# Altium PCB jz_drive0227.PcbDoc
Units mm, origin at the board's own origin, x right, y up, seen from the top; angles counter-clockwise.
Board outline 105.92 x 101.27 mm, 2 copper layers (Top Layer, Bottom Layer); 68 components, 39 nets, 289 pads, 25 vias.
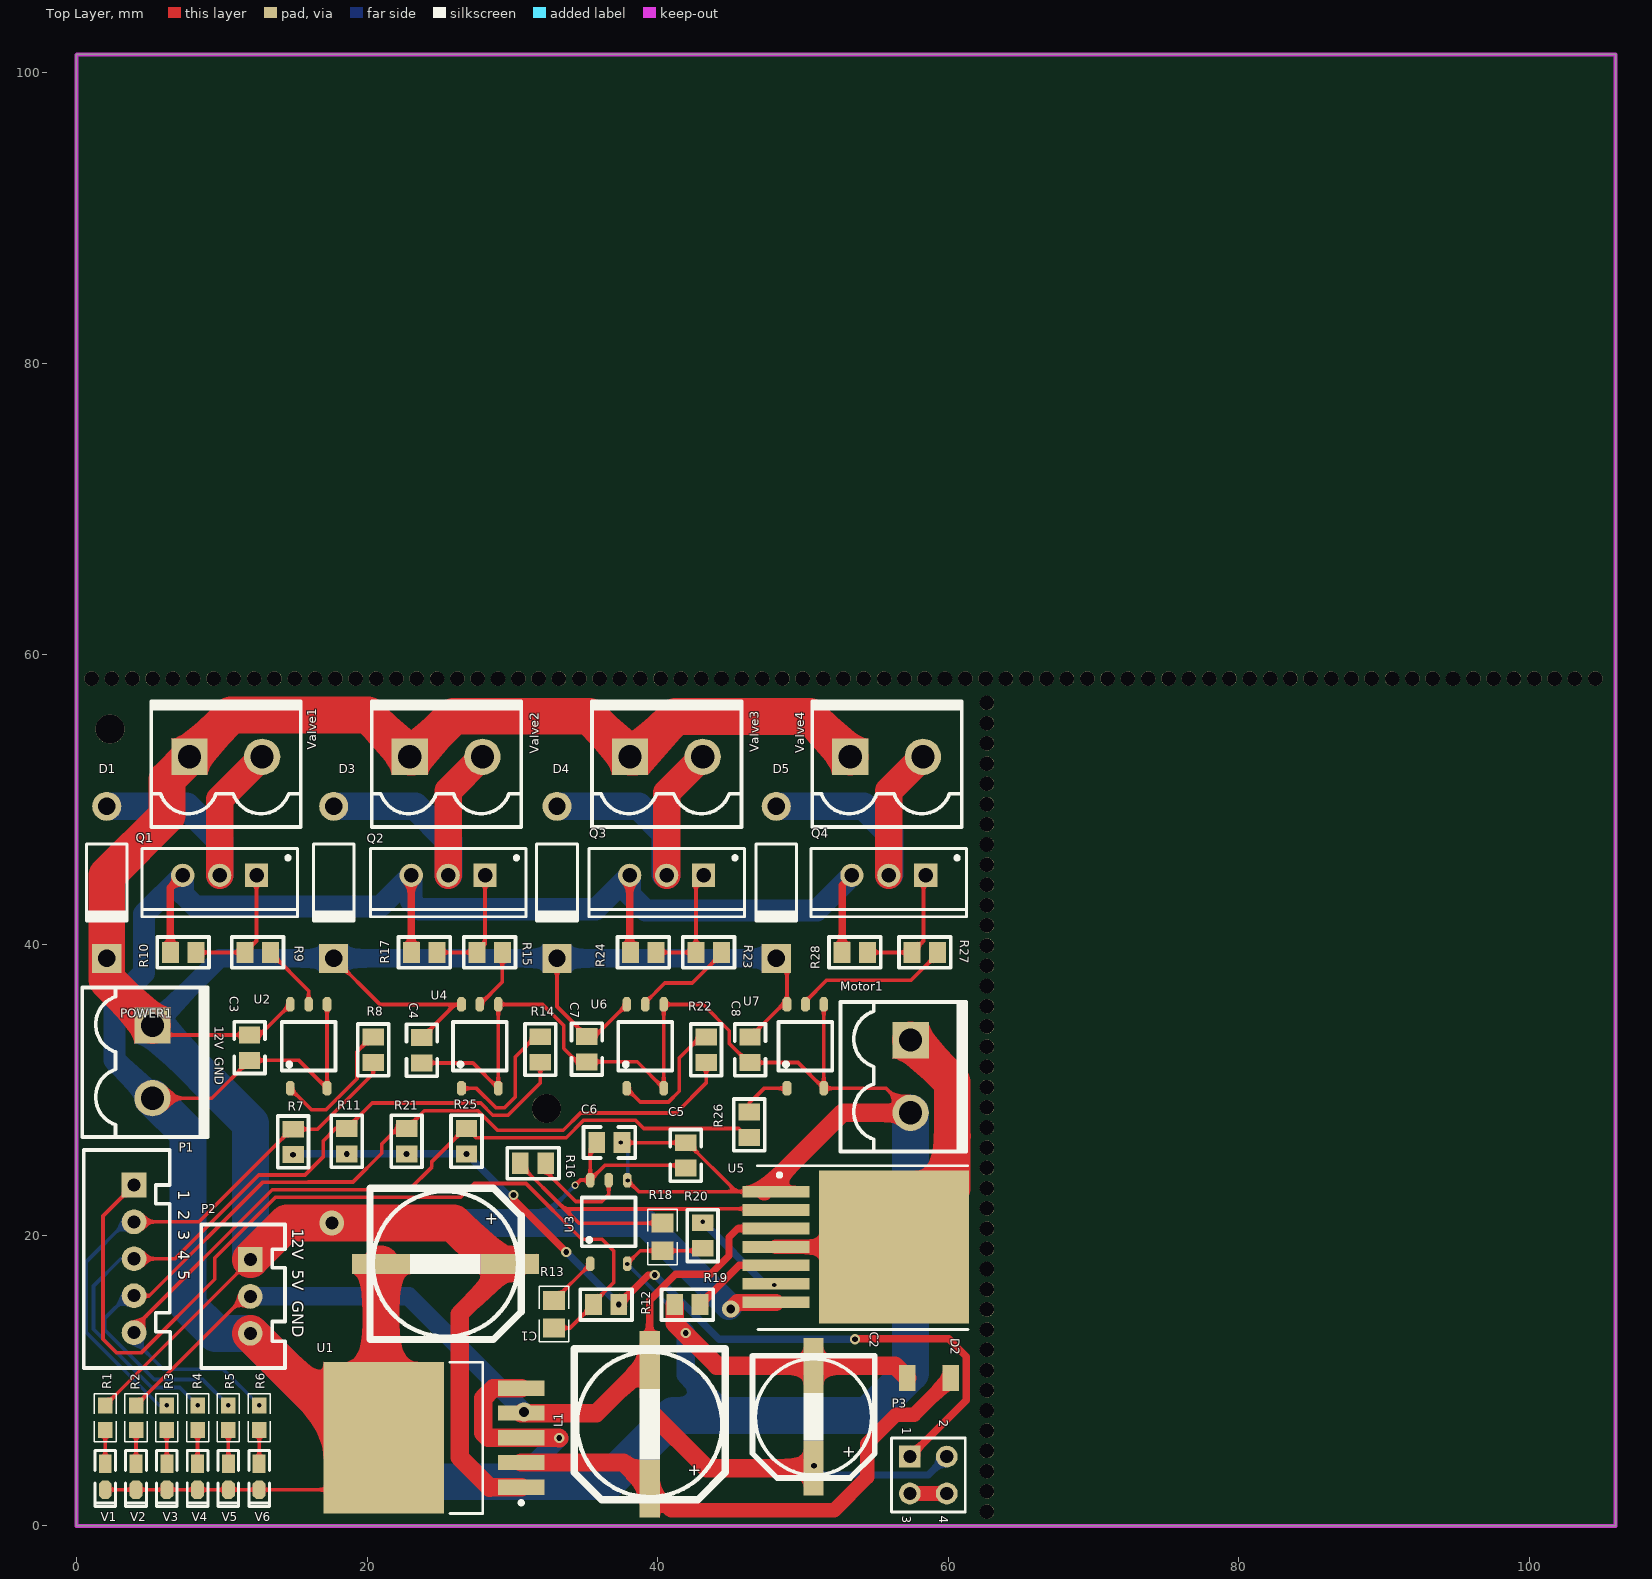
[diagram p0: Top Layer view]
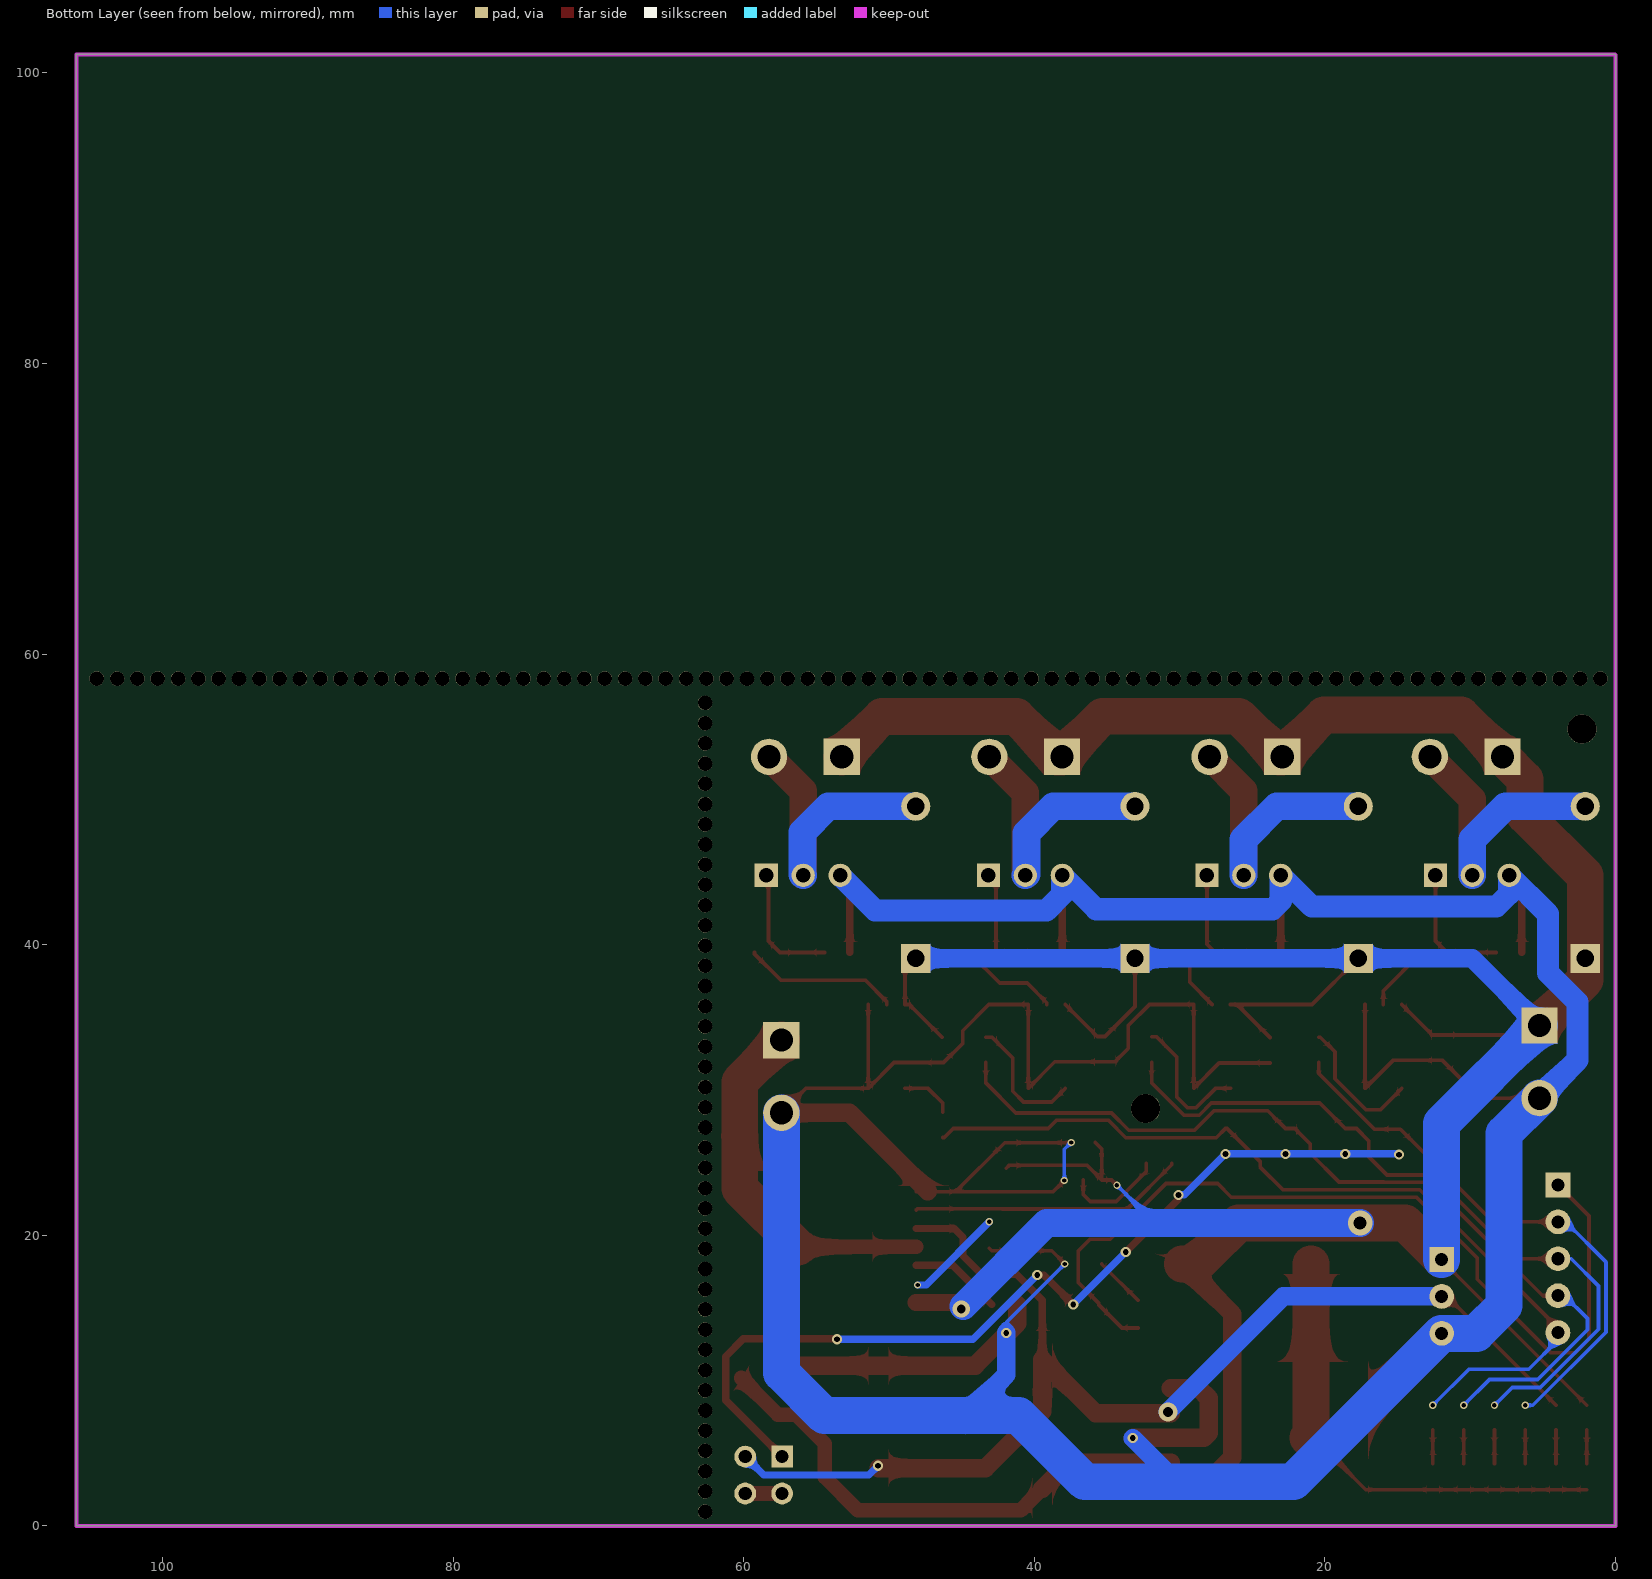
[diagram p1: Bottom Layer view, seen from below]

## Layer stack, top to bottom
Top Solder: solder mask 0.0102, Solder Resist, Dk 3.5
Top Layer: signal copper 0.0356
Dielectric 1: dielectric 0.32, FR-4, Dk 4.8
Bottom Layer: signal copper 0.0356
Bottom Solder: solder mask 0.0102, Solder Resist, Dk 3.5

## Board outline
0,0 0,101.244 0.025,101.27 105.918,101.27 105.918,0

## Design rules (kind name [scope] priority, off if disabled: settings)
Clearance [All] p1: gap=0.254 ignorepadtopadclearanceinfootprint=FALSE except(0: Arc-Hole Track-Hole SMDPad-Hole THPad-Hole Via-Hole Fill-Hole Poly-Hole Region-Hole Text-Hole)
ComponentClearance [All] p1: gap=0.22 collisioncheckmode=3 verticalgap=0.22 showdistances=FALSE
MinimumSolderMaskSliver [All] p1: minsoldermaskwidth=0.178
PolygonConnect [All] p1: connectstyle=Relief reliefconductorwidth=0.254 reliefentries=4 polygonreliefangle="90 Angle" airgapwidth=0.254
RoutingVias [All] p1: holewidth=0.3 width=0.5 viastyle="Through Hole" minholewidth=0.3 minwidth=0.5 maxholewidth=0.711 maxwidth=1.27
SilkToSilkClearance [All] p1: silktosilkclearance=0
SilkToSolderMaskClearance [IsPad] p1: minsilkscreentomaskgap=0 clearancetoexposedcopper=TRUE
SolderMaskExpansion [All] p1: expansion=0.102
Width [All] p1: maxlimit=2.54 minlimit=0.254 preferedwidth=0.254 minimp=50.000000 maximp=50.000000 favimp=50.000000
Width GND [InNet('GND')] p2: maxlimit=2.54 minlimit=0.254 preferedwidth=1.27 minimp=50.000000 maximp=50.000000 favimp=50.000000
Width 3.3V [InNet('VDD3.3')] p3: maxlimit=2.54 minlimit=0.254 preferedwidth=1.27 minimp=50.000000 maximp=50.000000 favimp=50.000000
Width 5V [InNet('VDD5.0')] p4: maxlimit=2.54 minlimit=0.254 preferedwidth=1.27 minimp=50.000000 maximp=50.000000 favimp=50.000000
Width POWER [InNet('POWERA')] p5: maxlimit=2.54 minlimit=0.254 preferedwidth=2.54 minimp=50.000000 maximp=50.000000 favimp=50.000000
26 further rules are at their usual default settings.

## Components (designator, comment, footprint, x,y, rotation, side; value= is the part's Value field where it differs from the comment)
C1 "10uF,16V" SMD-EC-F10 29.82,18.034 r180 top value=680uF
C2 "10uF,16V" SMD-EC-F8 50.724,3.988 r90 top value=220uF
C3 "0.1uF" LC-0805_C 11.913,32.918 r270 top
C4 "0.1uF" LC-0805_C 23.774,32.741 r270 top
C5 "0.1uF" LC-0805_C 41.935,25.502 r90 top
C6 "0.1uF" LC-0805_C 36.678,26.391 r0 top
C7 "0.1uF" LC-0805_C 35.128,32.817 r270 top
C8 "0.1uF" LC-0805_C 46.355,32.766 r270 top
D1 "1N4001" DO-41 2.083,44.298 r270 top
D2 "IN5824" LC-1206 58.674,10.185 r0 top
D3 "Diode 1N4001" DO-41 17.704,44.298 r270 top
D4 "Diode 1N4001" DO-41 33.071,44.298 r270 top
D5 "Diode 1N4001" DO-41 48.158,44.298 r270 top
L1 "Inductor" SMD-EC-F10 39.446,2.57 r90 top value=33uH
Motor1 "端子2P" KF2EDGK5.0-LI-2P 57.404,30.937 r270 top
P1 "Header 5" XH2.54-LI-5P 3.962,18.39 r270 top
P2 "Header 3" XH2.54-LI-3P 11.963,15.797 r270 top
P3 "Header 2X2" HDR2X2 57.353,4.775 r270 top
POWER1 "端子2P" KF2EDGK5.0-LI-2P 5.232,31.942 r270 top
Q1 "IRF540N" TO-220AB 9.855,44.78 r180 top
Q2 "IRF540N" TO-220AB 25.578,44.78 r180 top
Q3 "IRF540N" TO-220AB 40.615,44.78 r180 top
Q4 "IRF540N" TO-220AB 55.905,44.78 r180 top
R1 "1K" 0603-1 1.98,7.454 r270 top
R2 "1K" 0603-1 4.098,7.454 r270 top
R3 "1K" 0603-1 6.217,7.454 r270 top
R4 "1K" 0603-1 8.336,7.454 r270 top
R5 "1K" 0603-1 10.454,7.454 r270 top
R6 "1K" 0603-1 12.573,7.454 r270 top
R7 "10k" LC-0805_R 14.91,26.43 r270 top
R8 "150" LC-0805_R 20.422,32.766 r90 top
R9 "50" LC-0805_R 12.471,39.472 r180 top
R10 "10K" LC-0805_R 7.341,39.472 r0 top
R11 "10k" LC-0805_R 18.599,26.481 r270 top
R12 "10k" LC-0805_R 36.449,15.24 r0 top
R13 "150" 0805-1 32.868,14.58 r90 top
R14 "150" LC-0805_R 31.928,32.791 r90 top
R15 "50" LC-0805_R 28.434,39.472 r180 top
R16 "50" LC-0805_R 31.42,24.968 r180 top
R17 "10K" LC-0805_R 23.941,39.472 r0 top
R18 "10k" 0805-1 40.335,19.895 r90 top
R19 "3.3K" LC-0805_R 42.048,15.24 r0 top
R20 "3.3K" LC-0805_R 43.094,19.99 r90 top
R21 "10k" LC-0805_R 22.72,26.481 r270 top
R22 "150" LC-0805_R 43.332,32.766 r90 top
R23 "50" LC-0805_R 43.51,39.472 r180 top
R24 "10K" LC-0805_R 39.014,39.472 r0 top
R25 "10k" LC-0805_R 26.841,26.481 r270 top
R26 "150" LC-0805_R 46.304,27.61 r90 top
R27 "50" LC-0805_R 58.383,39.472 r180 top
R28 "10K" LC-0805_R 53.569,39.472 r0 top
U1 "LM2596S-5.0" TS5B_N 24.608,6.071 r180 top
U2 "TLP155" so6 14.707,30.115 r0 top
U3 "TLP155" so6 35.357,18.034 r0 top
U4 "TLP155" so6 26.492,30.115 r0 top
U5 "BTS7960" BTS7960 56.388,19.202 r270 top
U6 "TLP155" so6 37.871,30.115 r0 top
U7 "TLP155" so6 48.895,30.115 r0 top
V1 "LED Chip" "LED 0603G" 1.974,3.39 r270 top
V2 "LED Chip" "LED 0603G" 4.092,3.39 r270 top
V3 "LED Chip" "LED 0603R" 6.211,3.39 r270 top
V4 "LED Chip" "LED 0603R" 8.329,3.39 r270 top
V5 "LED Chip" "LED 0603R" 10.447,3.39 r270 top
V6 "LED Chip" "LED 0603R" 12.566,3.39 r270 top
Valve1 "" KF2EDGK5.0-LI-2P 10.276,52.934 r0 top
Valve2 "端子2P" KF2EDGK5.0-LI-2P 25.435,52.934 r0 top
Valve3 "端子2P" KF2EDGK5.0-LI-2P 40.594,52.934 r0 top
Valve4 "端子2P" KF2EDGK5.0-LI-2P 55.753,52.934 r0 top

## Footprints (in the part's own frame and the unit in brackets; to place one, negate y for a bottom-side part, rotate by r counter-clockwise, add the part's x,y. Pads: shape width x height; smd on the part's side, far side on the other; paste and mask are expansions set on the pad)
0603-1 [mm] "贴片带丝印"
  rect 1.1x1 smd: 1(-0.85,0) 2(0.85,0)
  silkscreen extent -1.65,-0.76 1.65,0.76, body extent -1.14,-0.38 1.14,0.38, height 1
0805-1 [mm] "贴片带丝印"
  rect 1.3x1.5 smd: 1(-0.95,0) 2(0.95,0)
  silkscreen extent -1.91,-1.02 1.91,1.02, body extent -1.14,-0.51 1.14,0.51, height 1
BTS7960 [mm] "贴片BTS7960"
  rect 0.8x4.6 smd: 1(-3.81,-8.255) 2(-2.54,-8.255) 3(-1.27,-8.255) 4(0,-8.255) 5(1.27,-8.255) 6(2.54,-8.255) 7(3.81,-8.255)
  rect 10.5x10.3 smd: 8(0,-0.127)
  silkscreen extent -5.59,-9.53 5.68,4.96
DO-41 [mm] "Diode, Axial; Body 5.2 x 2.7 mm (LxDia. max), Lead Dia. 0.86 mm (max)"
  round 2 hole 1.2: 1(-5.23,0)
  rect 2x2 hole 1.2: 2(5.23,0)
  silkscreen extent -2.65,-1.4 2.75,1.4
HDR2X2 [mm] "Connector; Header; 2x2 Position"
  rect 1.5x1.5 hole 0.9: 1(0,0)
  round 1.5 hole 0.9: 2(0,2.54) 3(2.54,0) 4(2.54,2.54)
  silkscreen extent -1.27,-1.27 3.81,3.81
KF2EDGK5.0-LI-2P [mm] "立插端子"
  rect 2.5x2.5 hole 1.6: 1(-2.5,0)
  round 2.5 hole 1.6: 2(2.5,0)
  silkscreen extent -5.12,-4.83 5.17,3.81, body extent -5.04,-4.75 5.04,3.75, height 11.25
LC-0805_C [mm]
  rect 1.16x1.47 smd: 1(-0.875,0) 2(0.875,0)
  silkscreen extent -1.78,-1.06 1.78,1.06, body extent -1,-0.62 1,0.63, height 0.77
LC-0805_R [mm]
  rect 1.16x1.47 smd: 1(-0.875,0) 2(0.875,0)
  silkscreen extent -1.78,-1.06 1.78,1.06, body extent -1,-0.62 1,0.63, height 0.49
LC-1206 [mm]
  rect 1.13x1.8 smd: 1(-1.49,0) 2(1.49,0)
"LED 0603G" [mil] "绿色0603LED"
  rect 50x35 smd: 1(-35,0.26)
  oct 50x35 smd: 2(35,0.26)
  silkscreen extent -71,-28 81,28, body extent -31,-16 32,16, height 18
"LED 0603R" [mil] "红色0603LED"
  rect 50x35 smd: 1(-35,0.26)
  oct 50x35 smd: 2(35,0.26)
  silkscreen extent -71,-28 81,28, body extent -31,-16 31,16, height 18
SMD-EC-F8 [mm]
  rect 3.8x1.4 smd: 1(0,0) 2(7.051,0)
  silkscreen extent -0.69,-4.22 7.71,4.2
SMD-EC-F10 [mm]
  rect 4x1.4 smd: 1(0,0) 2(8.86,0)
  silkscreen extent -0.78,-5.2 9.62,5.2
so6 [mm]
  oct 0.6x1 smd: 1(0,0) 3(2.54,0) 4(2.54,5.775) 5(1.27,5.775) 6(0,5.775)
  silkscreen extent -0.58,1.22 3.12,4.57
TO-220AB [mm] "TO, Thru-Hole, Vertical, Heatsink Mounted; 3 In-Line Leads; Pitch 2.54 mm"
  rect 1.6x1.6 hole 1: 1(-2.54,0)
  round 1.6 hole 1: 2(0,0) 3(2.54,0)
  silkscreen extent -5.35,-1.85 5.35,2.85, body extent -5.4,-1.9 5.4,2.9, height 19.3
TS5B_N [mm] "D2-PAK, 6-Leads, Body 8.6x10.2mm, Pitch 1.7mm, Lead Span 14.1mm, IPC Medium Density"
  rect 3.2x1.05 smd: 1(-6,3.4) 2(-6,1.7) 3(-6,0) 4(-6,-1.7) 5(-6,-3.4)
  rect 8.3x10.45 smd: 6(3.45,0)
  silkscreen extent -6.13,-5.2 -1.1,5.2, body extent -3.35,-5.2 6.05,5.2, height 4.65
XH2.54-LI-3P [mm] "接插件，3P"
  rect 1.7x1.7 hole 0.9: 1(-2.54,0)
  round 1.7 hole 0.9: 2(0,0) 3(2.54,0)
  silkscreen extent -4.95,-3.38 4.93,2.39, body extent -5.04,-3.3 5.04,2.4, height 7.03
XH2.54-LI-5P [mm] "接插件，5P"
  rect 1.7x1.7 hole 0.9: 1(-5.08,0)
  round 1.7 hole 0.9: 2(-2.54,0) 3(0,0) 4(2.54,0) 5(5.08,0)
  silkscreen extent -7.48,-3.45 7.52,2.49, body extent -7.58,-3.3 7.58,2.4, height 7.03

## Part data
C1 C2: library part "Cap Pol 2x5", "Polarized Capacitor (Radial)", Voltage=16V, Published=8-Jun-2000, Publisher="Altium Limited", Revision="July-2002: Re-released for DXP Platform."
C3 C4 C5 C6 C7 C8: library part Cap, "Capacitor", LatestRevisionDate=17-Jul-2002, LatestRevisionNote="Re-released for DXP Platform.", PackageDescription="Radial Cap, Thru-Hole; 2 Leads; 0.3 in Pin Spacing", PackageReference=RAD-0.3, Published=8-Jun-2000, Publisher="Altium Limited"
D1: library part "Diode 1N4001", "1 Amp General Purpose Rectifier", Code_JEDEC=DO-204-AL, ComponentLink1Description="Manufacturer Link", ComponentLink1URL=http://www.fairchildsemi.com/, ComponentLink2Description=Datasheet, ComponentLink2URL=http://www.fairchildsemi.com/ds/1N%2F1N4001.pdf, DatasheetVersion=1998, LatestRevisionDate=17-Jul-2002, LatestRevisionNote="Re-released for DXP Platform.", PackageDescription="Diode, Axial; Body 5.2 x 2.7 mm (LxDia. max), Lead Dia. 0.86 mm (max)", PackageReference=DO-41, PackageVersion=Aug-1999, Published=8-Jun-2000, Publisher="Altium Limited"
D2: library part "Diode  Zener", "Zener Diode", Published=8-Jun-2000, Publisher="Altium Limited", Revision="July-2002: Re-released for DXP Platform."
D3 D4 D5: "1 Amp General Purpose Rectifier", Code_JEDEC=DO-204-AL, ComponentLink1Description="Manufacturer Link", ComponentLink1URL=http://www.fairchildsemi.com/, ComponentLink2Description=Datasheet, ComponentLink2URL=http://www.fairchildsemi.com/ds/1N%2F1N4001.pdf, DatasheetVersion=1998, LatestRevisionDate=17-Jul-2002, LatestRevisionNote="Re-released for DXP Platform.", PackageDescription="Diode, Axial; Body 5.2 x 2.7 mm (LxDia. max), Lead Dia. 0.86 mm (max)", PackageReference=DO-41, PackageVersion=Aug-1999, Published=8-Jun-2000, Publisher="Altium Limited"
Motor1 POWER1 Valve1 Valve2 Valve3 Valve4: library part DUANZI2
P1: "Header, 5-Pin", LatestRevisionDate=17-Jul-2002, LatestRevisionNote="Re-released for DXP Platform.", Publisher="Altium Limited"
P2: "Header, 3-Pin", LatestRevisionDate=17-Jul-2002, LatestRevisionNote="Re-released for DXP Platform.", Publisher="Altium Limited"
P3: "Header, 2-Pin, Dual row", LatestRevisionDate=17-Jul-2002, LatestRevisionNote="Re-released for DXP Platform.", Publisher="Altium Limited"
Q1 Q2 Q3 Q4: "HEXFET Power MOSFET", ComponentLink1Description="Manufacturer Link", ComponentLink1URL=http://www.irf.com/, ComponentLink2Description=Datasheet, ComponentLink2URL=http://www.irf.com/product-info/datasheets/data/irf540n.pdf, DatasheetVersion=May-1998, LatestRevisionDate=17-Jul-2002, LatestRevisionNote="Re-released for DXP Platform.", Note="Pin 2 is electrically connected to pin 4.", PackageDescription="TO, Thru-Hole, Vertical, Heatsink Mounted; 3 In-Line Leads; Pitch 2.54 mm", PackageReference=TO-220AB, PackageVersion=Feb-1997, Published=8-Jun-2000, Publisher="Altium Limited", Sim Note="Thermal Model provided is not called on from main Subckt."
R1 R2 R3 R4 R5 R6: library part "Resistor Chip 0805", "Resistor", Published=8-Jun-2000, Publisher="Altium Limited", Revision="July-2002: Re-released for DXP Platform."
R7 R8 R9 R10 R11 R12 R13 R14 R15 R16 R17 R18 R19 R20 R21 R22 R23 R24 R25 R26 R27 R28: library part Res2, "Resistor", LatestRevisionDate=17-Jul-2002, LatestRevisionNote="Re-released for DXP Platform.", PackageDescription="Axial Device, Thru-Hole; 2 Leads; 0.4 in Pin Spacing", PackageReference=AXIAL-0.4, Published=8-Jun-2000, Publisher="Altium Limited"
U1: "SIMPLE SWITCHER?Power Converter 150 KHz 3A Step-Down Voltage Regulator, 5-pin TO-263", Manufacturer="National Semiconductor", PackageTopMarking="NSUZXYTTE#*LM2596S*-5.0 P+", PowerWise=N, Supplier Part Number 1=1214546, Code_JEDEC=MO-169-AB, ComponentLink1Description="LM2596 Datasheet", ComponentLink1URL=http://www.national.com/ds/LM/LM2596.pdf, ComponentLink2Description="LM2596 Web Page", ComponentLink2URL=http://www.national.com/pf/LM/LM2596.html, ComponentLink3Description="TS5B Package Page", ComponentLink3URL=http://www.national.com/packaging/folders/ts5b.html, CompType=Switcher, DatasheetVersion=May-2002, PackageDescription="TO-263, Molded, .400 x .390 x .180in, 5 Lead, .067in Pitch, Surface Mount", PackageReference=TS5B, PackageVersion="revD, Apr-2005", PartNumber=LM2596S-5.0, PinCount=5, Published=4-Dec-2008, Publisher="Altium Limited", RoHS=N, Supplier 1=Farnell
U5: library part Component_1_1
V1 V2 V3 V4 V5 V6: "Typical Chip LED", Published=8-Jun-2000, Publisher="Altium Limited", Revision="July-2002: Re-released for DXP Platform."
L1: Code_IEC=1005, Code_JEITA=0402, LatestRevisionDate=29-May-2009, LatestRevisionNote="IPC-7351 Footprint Added.", PackageDescription="Chip Inductor", PackageReference=0402-A, Published=8-Jun-2000, Publisher="Altium Limited"

## Free pads (board coordinates)
  round 2 hole 2 unplated: 4(2.311,54.839) 5(32.334,28.727)
  round 1 hole 1 unplated: 6(1.041,58.318) 6(6.635,58.318) 6(12.228,58.318) 6(17.822,58.318) 6(23.415,58.318) 6(29.009,58.318) 6(34.602,58.318) 6(40.196,58.318) 6(45.789,58.318) 6(51.383,58.318) 6(56.976,58.318) 6(62.57,58.318) 6(62.66,3.773) 6(62.66,9.338) 6(62.66,14.903) 6(62.66,20.468) 6(62.66,26.033) 6(62.66,31.597) 6(62.66,37.162) 6(62.66,45.509) 6(62.66,51.074) 6(62.66,53.857) 6(62.66,56.639) 6(68.163,58.318) 6(73.757,58.318) 6(79.35,58.318) 6(84.944,58.318) 6(93.334,58.318) 6(98.927,58.318) 6(101.724,58.318) 7(2.44,58.318) 7(8.033,58.318) 7(13.627,58.318) 7(19.22,58.318) 7(24.814,58.318) 7(30.407,58.318) 7(36.001,58.318) 7(41.594,58.318) 7(47.188,58.318) 7(52.781,58.318) 7(58.375,58.318) 7(62.66,5.165) 7(62.66,10.729) 7(62.66,16.294) 7(62.66,21.859) 7(62.66,27.424) 7(62.66,32.989) 7(62.66,38.553) 7(62.66,46.901) 7(62.66,52.466) 7(63.968,58.318) 7(69.561,58.318) 7(75.155,58.318) 7(80.748,58.318) 7(86.342,58.318) 7(94.732,58.318) 7(103.122,58.318) 8(3.838,58.318) 8(9.432,58.318) 8(15.025,58.318) 8(20.619,58.318) 8(26.212,58.318) 8(31.806,58.318) 8(37.399,58.318) 8(42.992,58.318) 8(48.586,58.318) 8(54.179,58.318) 8(59.773,58.318) 8(62.66,0.991) 8(62.66,6.556) 8(62.66,12.121) 8(62.66,17.685) 8(62.66,23.25) 8(62.66,28.815) 8(62.66,34.38) 8(62.66,39.945) 8(62.66,42.727) 8(62.66,48.292) 8(65.366,58.318) 8(70.96,58.318) 8(76.553,58.318) 8(82.147,58.318) 8(87.74,58.318) 8(90.537,58.318) 8(96.13,58.318) 8(104.521,58.318) 9(5.237,58.318) 9(10.83,58.318) 9(16.423,58.318) 9(22.017,58.318) 9(27.61,58.318) 9(33.204,58.318) 9(38.797,58.318) 9(44.391,58.318) 9(49.984,58.318) 9(55.578,58.318) 9(61.171,58.318) 9(62.66,2.382) 9(62.66,7.947) 9(62.66,13.512) 9(62.66,19.077) 9(62.66,24.641) 9(62.66,30.206) 9(62.66,35.771) 9(62.66,41.336) 9(62.66,44.118) 9(62.66,49.683) 9(62.66,55.248) 9(66.765,58.318) 9(72.358,58.318) 9(77.952,58.318) 9(83.545,58.318) 9(89.139,58.318) 9(91.935,58.318) 9(97.529,58.318) 9(100.326,58.318)

## Via types
v1: diameter 0.7, hole 0.4, Top Layer to Bottom Layer, 12 vias
v2: diameter 0.5, hole 0.3, Top Layer to Bottom Layer, 10 vias
v3: diameter 1.2, hole 0.6, Top Layer to Bottom Layer, 1 vias
v4: diameter 1.7, hole 0.9, Top Layer to Bottom Layer, 1 vias
v5: diameter 1.3, hole 0.7, Top Layer to Bottom Layer, 1 vias

## Nets (pads, with @x,y where several pads share a name; then routed paths per layer and width w, separated by ;. In a path a pad name is that pad's centre, name@x,y a point inside that pad or via, vN(x,y) a via of type N, cw(c..) or ccw(c..) an arc to the next point about the centre after c; other vN are vias at no path point)
EPWM1_A: P1.1 R12.1 R13.1 | length 62.3
  Top Layer w0.254: P1.1 1.829,21.336 1.829,12.852 2.769,11.913 4.445,11.913 9.508,16.976 9.508,18.449 13.691,22.631 26.441,22.631 27.381,23.571 30.937,23.571 34.773,19.736 36.17,19.736 36.982,18.923 36.982,16.752 35.574,15.344 R12.1 33.964,13.63 R13.1
EPWM2_A: P1.2 R3.1 R7.1 R8.1 | length 38.4
  Top Layer w0.254: P1.2 8.431,20.93 14.806,27.305 R7.1 16.583,27.305 20.422,31.144 R8.1
  Bottom Layer w0.254: P1.2 3.429,20.93 0.66,18.161 0.66,13.335 5.691,8.304 v2(6.217,8.304)
EPWM3_A: P1.3 R4.1 R11.1 R14.1 | length 51.6
  Top Layer w0.254: P1.3 6.782,18.39 12.548,24.155 15.723,24.155 16.993,25.425 16.993,26.518 17.831,27.356 R11.1 20.352,29.108 27.82,29.108 28.655,28.274 29.696,28.274 31.928,30.505 R14.1
  Bottom Layer w0.254: P1.3 3.048,18.39 1.168,16.51 1.168,13.545 5.189,9.525 7.115,9.525 v2(8.336,8.304)
EPWM4_A: P1.4 R5.1 R21.1 R22.1 | length 62.5
  Top Layer w0.254: P1.4 5.004,15.85 12.802,23.647 15.933,23.647 15.958,23.673 19.025,23.673 21.006,25.654 21.006,26.289 22.073,27.356 R21.1 23.939,28.575 27.635,28.575 28.981,27.229 33.495,27.229 34.689,28.423 41.275,28.423 43.332,30.48 R22.1
  Bottom Layer w0.254: P1.4 3.505,15.85 1.93,14.275 1.93,13.502 5.348,10.084 8.675,10.084 v2(10.454,8.304)
EPWM5_A: P1.5 R6.1 R25.1 R26.1 | length 60.8
  Top Layer w0.254: P1.5 3.962,13.622 13.48,23.139 22.885,23.139 24.46,24.714 24.46,25.078 26.738,27.356 R25.1 27.476,26.721 33.706,26.721 34.9,27.915 38.481,27.915 39.04,27.356 45.579,27.356 46.2,26.735 R26.1
  Bottom Layer w0.254: P1.5 3.962,12.802 5.969,10.795 10.082,10.795 v2(12.573,8.304)
GND: C1.2 C2.2 C3.2 C4.2 C5.2 C6.2 C7.2 C8.2 D2.1 Motor1.2 P2.3 POWER1.2 Q1.3 Q2.3 Q3.3 Q4.3 R10.1 R17.1 R18.1 R19.1 R20.1 R24.1 R28.1 U1.3 U1.5 U1.6 U2.3 U2.4 U3.3 U3.4 U4.3 U4.4 U5.1 U6.3 U6.4 U7.3 U7.4 V1.2 V2.2 V3.2 V4.2 V5.2 V6.2 | length 396.2
  Top Layer w0.254: V1.2 V2.2 V3.2 V4.2 V5.2 V6.2 17.192,2.501 20.762,6.071 U1.6@20.96,6.269 ; POWER1.2 9.311,29.442 C3.2 15.318,32.043 U2.3 U2.4 ; C4.2 27.282,31.866 U4.3 U4.4 32.08,35.89 33.528,34.442 33.528,32.868 34.454,31.942 C7.2 38.585,31.942 U6.3 U6.4 43.129,35.89 44.933,34.087 44.933,33.21 46.251,31.891 C8.2 49.659,31.891 U7.3 ; C6.2 37.567,26.377 C5.2 42.039,26.377 45.403,23.012 ; v2(37.897,18.034) 38.808,18.945 R18.1 42.924,18.945 R20.1 ; U3.4 v2(37.931,23.774) 38.693,23.012 45.403,23.012 ; U5.1 45.403,23.012 ; U7.4 U7.3 ; Motor1.2 55.726,30.115 U7.3
  Top Layer w0.508: R10.1 6.466,43.931 Q1.3 ; Q2.3 23.038,39.5 R17.1 ; Q3.3 38.075,39.536 R24.1 ; R28.1 52.694,44.108 Q4.3
  Top Layer w1.27: U1.5 28.673,9.471 27.991,8.788 27.991,6.401 28.321,6.071 U1.3 33.198,6.071 v1(33.223,6.045) ; R19.1 41.173,13.945 44.079,11.039 C2.2 56.331,11.039 D2.1 ; U5.1@47.32,23.031 52.726,28.437 Motor1.2
  Top Layer w2.54: P2.3 19.15,6.071 20.762,6.071 U1.6 20.96,6.269 C1.2
  Bottom Layer w0.254: v2(37.465,26.391) 37.931,25.924 v2(37.931,23.774) ; v2(37.897,18.034) 41.935,13.995 v1(41.935,13.284)
  Bottom Layer w1.27: 30.505,3.046 30.505,3.327 v1(33.223,6.045) ; v1(41.935,13.284) 41.935,10.414 44.755,7.595
  Bottom Layer w1.524: POWER1.2 2.616,32.058 2.616,36.043 4.648,38.075 4.648,42.113 Q1.3 7.315,43.51 8.204,42.621 20.879,42.621 Q2.3 23.038,43.002 23.597,42.443 35.738,42.443 Q3.3 38.075,43.459 39.167,42.367 50.952,42.367 Q4.3
  Bottom Layer w2.54: POWER1.2 7.671,27.003 7.671,15.164 9.577,13.257 P2.3 22.174,3.046 30.505,3.046 36.525,3.046 41.073,7.595 44.755,7.595 54.458,7.595 57.404,10.541 Motor1.2
NetD1_1: D1.1 Q1.2 Valve1.2 | length 20.5
  Top Layer w1.905: Q1.2 9.855,50.013 Valve1.2
  Bottom Layer w1.905: D1.1 7.572,49.528 9.855,47.244 Q1.2
NetD2_2: D2.2 L1.1 U1.2 | length 36
  Top Layer w1: L1.1 40.924,1.092 52.146,1.092 54.407,3.353 54.407,5.664 56.413,7.671 57.649,7.671 D2.2
  Top Layer w1.27: U1.2 37.646,4.371 L1.1
NetD3_1: D3.1 Q2.2 Valve2.2 | length 20.4
  Top Layer w1.905: Q2.2 25.578,50.576 Valve2.2
  Bottom Layer w1.905: D3.1 23.32,49.528 25.603,47.244 25.603,44.806 Q2.2
NetD4_1: D4.1 Q3.2 Valve3.2 | length 20.3
  Top Layer w1.905: Q3.2 40.615,50.454 Valve3.2
  Bottom Layer w1.905: D4.1 38.687,49.528 40.538,47.676 40.538,44.856 Q3.2
NetD5_1: D5.1 Q4.2 Valve4.2 | length 20.7
  Top Layer w1.905: Q4.2 55.905,50.586 Valve4.2
  Bottom Layer w1.905: D5.1 54.181,49.528 55.956,47.752 55.956,44.831 Q4.2
NetMotor1_1: Motor1.1 U5.4 U5.8 | length 25.2
  Top Layer w1: U5.4 U5.8
  Top Layer w2.54: U5.8 60.274,23.216 60.274,30.567 Motor1.1
NetP3_3: P3.3 P3.4 | length 2.5
  Top Layer w1: P3.3 P3.4
NetQ1_1: Q1.1 R9.2 R10.2 | length 9
  Top Layer w0.254: R10.2 R9.2 12.385,40.261 12.385,44.77 Q1.1
NetQ2_1: Q2.1 R15.2 R17.2 | length 8.3
  Top Layer w0.254: R17.2 R15.2 28.118,40.03 Q2.1
NetQ3_1: Q3.1 R23.2 R24.2 | length 8.3
  Top Layer w0.254: R24.2 R23.2 42.635,44.261 Q3.1
NetQ4_1: Q4.1 R27.2 R28.2 | length 8.8
  Top Layer w0.254: R28.2 R27.2 58.297,40.261 58.297,44.632 Q4.1
NetR1_2: R1.2 V1.1 | length 2.3
  Top Layer w0.254: V1.1 R1.2@1.98,6.603
NetR2_2: R2.2 V2.1 | length 2.3
  Top Layer w0.254: V2.1 R2.2
NetR3_2: R3.2 V3.1 | length 2.3
  Top Layer w0.254: V3.1 R3.2
NetR4_2: R4.2 V4.1 | length 2.3
  Top Layer w0.254: V4.1 R4.2
NetR5_2: R5.2 V5.1 | length 2.3
  Top Layer w0.254: V5.1 R5.2
NetR6_2: R6.2 V6.1 | length 2.3
  Top Layer w0.254: V6.1 R6.2
NetR8_2: R8.2 U2.1 | length 9.5
  Top Layer w0.254: U2.1 16.171,28.651 17.17,28.651 19.306,30.786 19.306,32.629 20.318,33.641 R8.2
NetR9_1: R9.1 U2.5 | length 4.7
  Top Layer w0.254: R9.1 15.977,36.841 U2.5
NetR13_2: R13.2 U3.1 | length 3.5
  Top Layer w0.254: R13.2 35.357,18.019 U3.1
NetR14_2: R14.2 U4.1 | length 9.6
  Top Layer w0.254: U4.1 27.532,30.115 28.865,28.782 29.464,28.782 30.201,29.518 30.201,32.283 31.584,33.666 R14.2
NetR15_1: R15.1 U4.5 | length 4.2
  Top Layer w0.254: U4.5 29.309,37.437 R15.1
NetR16_1: R16.1 U3.5 | length 7
  Top Layer w0.254: R16.1 32.295,24.398 34.366,22.327 36.144,22.327 36.627,22.809 U3.5
NetR16_2: R16.2 R18.2 U5.2 | length 26.1
  Top Layer w0.254: R16.2 30.545,24.864 33.591,21.819 ; R18.2 34.564,20.845 33.591,21.819 ; U5.2 48.05,21.826 42.201,21.826 42.194,21.819 33.591,21.819
NetR19_2: R19.2 U5.5 | length 6.3
  Top Layer w0.508: R19.2 45.616,17.932 U5.5
NetR20_2: R20.2 U5.6 | length 6.7
  Bottom Layer w0.508: v2(43.104,20.93) 47.447,16.586 v2(48.031,16.586)
NetR22_2: R22.2 U6.1 | length 9
  Top Layer w0.254: U6.1 38.802,29.185 40.742,29.185 41.478,29.921 41.478,32.207 42.912,33.641 R22.2
NetR23_1: R23.1 U6.5 | length 6.9
  Top Layer w0.254: U6.5 39.141,36.017 40.488,37.363 42.381,37.363 44.385,39.368 R23.1
NetR26_2: R26.2 U7.1 | length 3.6
  Top Layer w0.254: R26.2 46.304,29.108 47.311,30.115 U7.1
NetR27_1: R27.1 U7.5 | length 10.8
  Top Layer w0.254: U7.5 50.165,36.093 51.638,37.567 57.457,37.567 59.258,39.368 R27.1
POWERA: C1.1 C3.1 C4.1 C5.1 C6.1 C7.1 C8.1 D1.2 D3.2 D4.2 D5.2 P2.1 POWER1.1 R1.1 U1.1 U2.6 U3.6 U4.6 U5.7 U6.6 U7.6 Valve1.1 Valve2.1 Valve3.1 Valve4.1 | length 280.9
  Top Layer w0.254: R1.1 11.963,18.288 P2.1 ; POWER1.1 5.881,33.793 C3.1 12.61,33.793 U2.6 ; D3.2 20.881,35.89 26.049,35.89 ; C4.1 26.049,35.89 ; U4.6 26.049,35.89 ; D4.2 33.071,35.749 C7.1 35.673,33.692 U6.6 ; v2(34.315,23.444) 34.68,23.809 U3.6 ; C6.1 35.357,25.945 U3.6 ; C5.1 41.746,24.816 36.364,24.816 U3.6 ; C8.1 48.604,35.89 U7.6 48.895,38.331 D5.2
  Top Layer w1.16: v3(45.034,14.935) 45.491,15.392 U5.7
  Top Layer w1.27: C1.1 26.365,14.58 26.365,4.724 28.448,2.642 28.477,2.671 U1.1
  Top Layer w2.54: POWER1.1 2.083,37.591 D1.2 2.083,44.755 6.223,48.895 6.223,51.38 Valve1.1 10.646,55.804 20.065,55.804 Valve2.1 23.139,52.934 25.933,55.728 35.3,55.728 Valve3.1 38.456,52.934 41.23,55.708 50.479,55.708 Valve4.1 ; P2.1 14.48,20.853 v4(17.577,20.853) 25.959,20.853 28.778,18.034 C1.1
  Bottom Layer w0.254: 31.725,20.853 v2(34.315,23.444)
  Bottom Layer w1.27: POWER1.1 9.858,39.068 D3.2 D4.2 D5.2
  Bottom Layer w1.905: v4(17.577,20.853) 31.725,20.853 39.167,20.853 v3@44.895,15.126
  Bottom Layer w2.54: POWER1.1 11.963,27.711 P2.1
VDD: P3.1 R7.2 R11.2 R12.2 R21.2 R25.2 | length 62.5
  Top Layer w0.508: v1(30.074,22.784) 30.074,22.49 v1(33.706,18.858) ; v1(37.324,15.24) 39.356,17.272 v1(39.802,17.272) ; v1@53.543,12.878 60.02,12.878 61.237,11.661 61.237,8.659 P3.1
  Bottom Layer w0.508: v1(14.91,25.555) 14.961,25.606 v1(18.599,25.606) v1(22.72,25.606) v1(26.841,25.606) 29.663,22.784 v1(30.074,22.784) ; v1@33.706,18.872 v1(33.706,18.858) v1(37.324,15.24) ; v1(39.802,17.272) 44.221,12.852 v1(53.569,12.852)
VDD5.0: C2.1 L1.2 P2.2 P3.2 R2.1 U1.4 U5.3 | length 87
  Top Layer w0.254: R2.1 11.433,15.639 P2.2@11.963,15.639 ; L1.2 L1.2@39.446,13.118
  Top Layer w0.508: L1.2 39.446,15.546 41.223,17.323 43.637,17.323 44.907,18.593 44.907,19.863 45.517,20.472 U5.3
  Top Layer w1.27: U1.4 35.787,7.771 L1.2 39.446,7.899 43.358,3.988 C2.1
  Bottom Layer w0.508: v1(50.749,4.14) 51.384,3.505 58.623,3.505 P3.2
  Bottom Layer w1.27: P2.2 22.862,15.797 v5(30.81,7.849)

## Keep-outs
Keep-Out Layer:
  lines w0.254: 0,57.531 0.025,57.556 ; 0,0 0,101.244 0.025,101.27 0.102,101.27 0.356,101.27 105.918,101.27 105.918,0 0,0

## Silkscreen, mask and mechanical layers (free items; w line width, h text height)
Top Overlay:
  text "12V  GND" at 9.5,34.392 h0.6 r270
  text "1  2  3  4  5" at 7.01,23.114 h0.8 r270
  text "12V  5V  GND" at 14.859,20.447 h0.8 r270

## Text inside footprints (layer, text, board x,y; h text height)
C1: Top Overlay "+" at 29.039,21.474 h0.8 r180
C2: Top Overlay "+" at 53.541,4.628 h0.8 r90
L1: Top Overlay "+" at 42.886,3.351 h0.8 r90
P3: Top Overlay "1" at 56.845,6.807 h0.6 r270; Top Overlay "2" at 59.385,7.315 h0.6 r270; Top Overlay "4" at 59.385,0.711 h0.6 r270; Top Overlay "3" at 56.845,0.711 h0.6 r270